# EAGLE board Master (EAGLE 7.7.0)
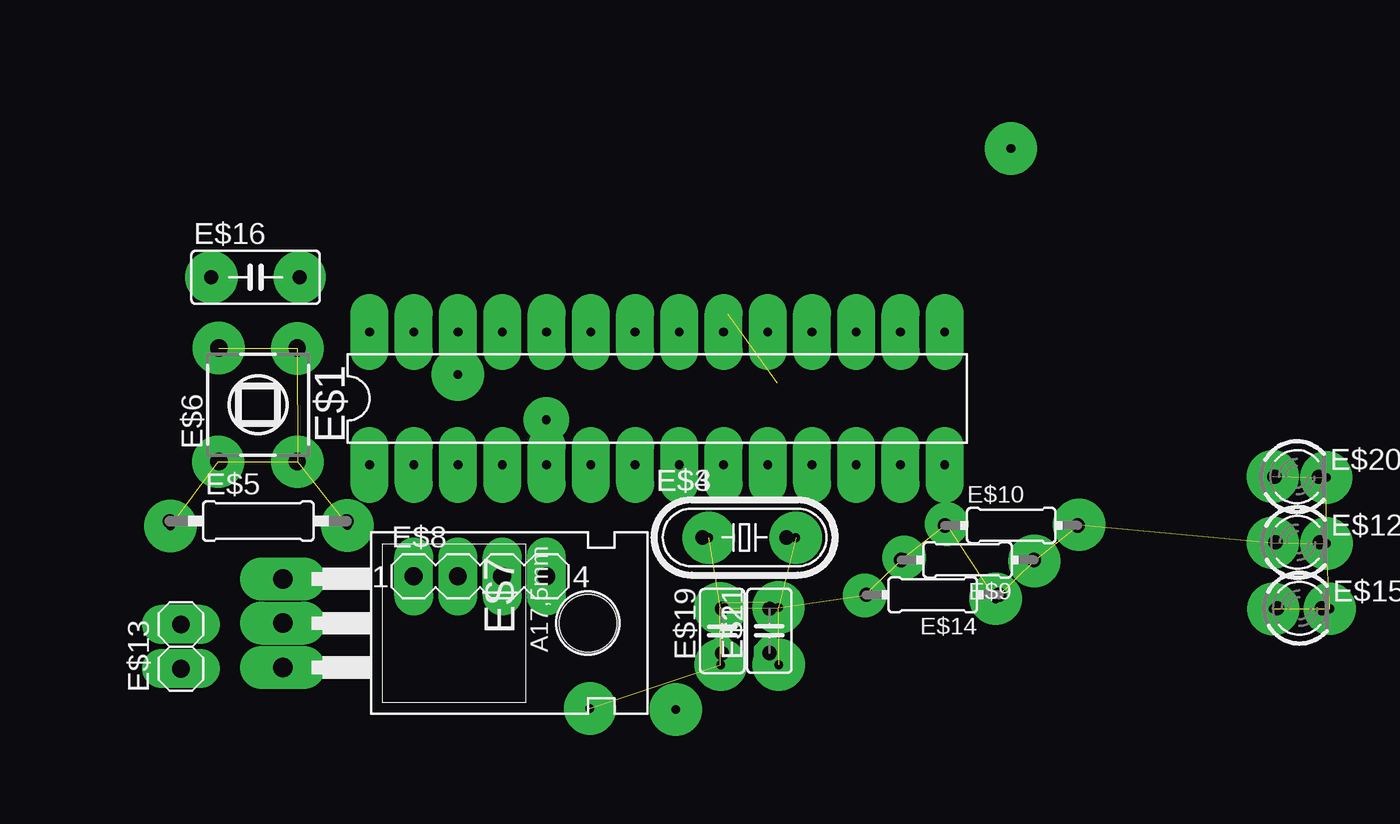
[diagram p0: board, top side]
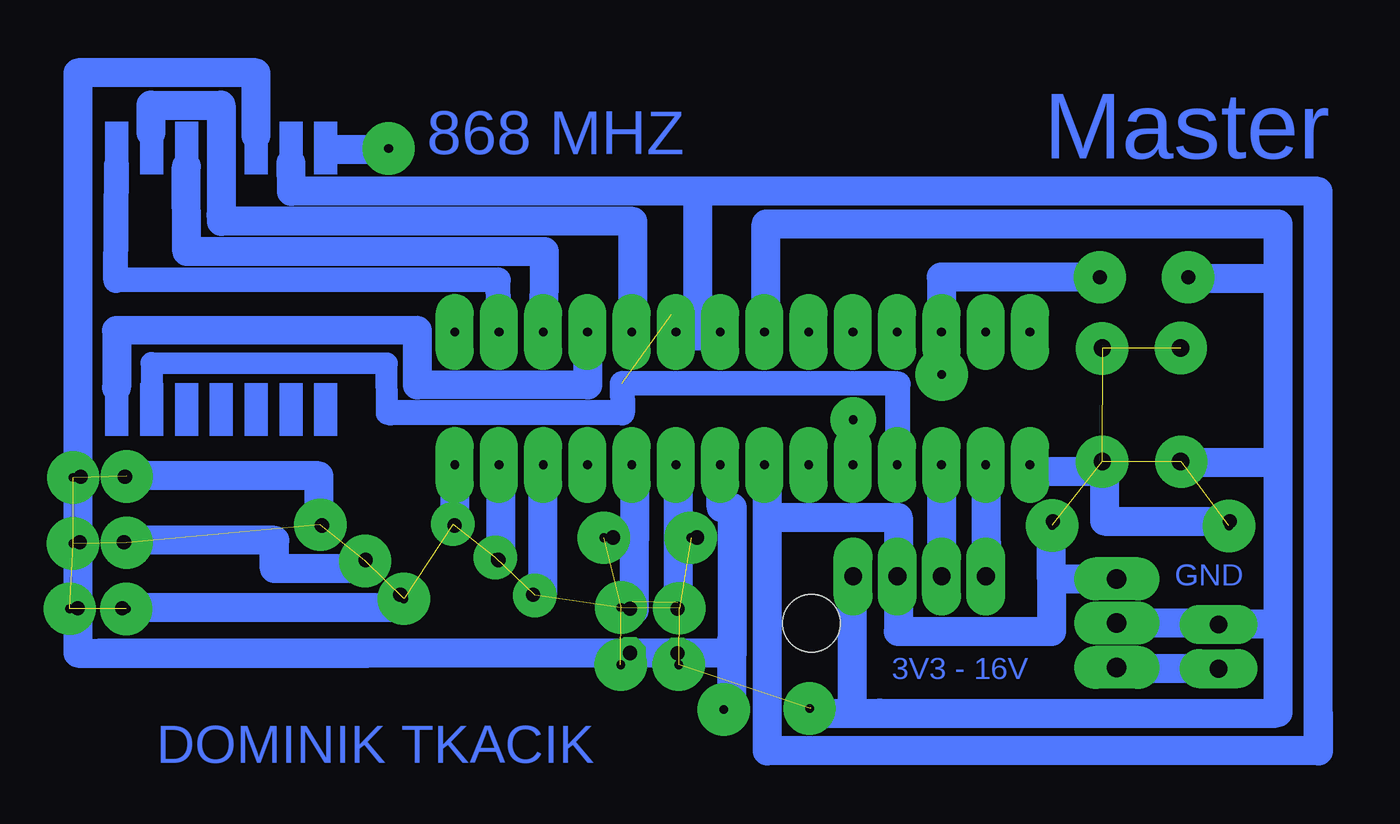
[diagram p1: board, bottom side, seen from below]

No outline drawn. Coordinates in mm, seen from the top.
Copper layers (1*16): Top 0.035mm / dielectric 1.5mm / Bottom 0.035mm
Design rules "default *": minimum track width 10mil, minimum drill 24mil, track to track 8mil, track to pad 8mil, pad to pad 8mil, via to via 8mil, smd to smd 8mil, copper to edge 40mil, drill to drill 8mil, minimum pad ring 10mil, minimum via ring 8mil, stop-mask expansion 4mil, vias tented up to drill 0mil, thermal gap 10mil

## Footprints (pad centres in the part's own frame; a part is rotated, then mirrored left to right if it is on the bottom)
DIL28-3 = drill 0.5 pad 2.184 long: 1 -16.51,-3.81; 2 -13.97,-3.81; 3 -11.43,-3.81; 4 -8.89,-3.81; 5 -6.35,-3.81; 6 -3.81,-3.81; 7 -1.27,-3.81; 8 1.27,-3.81; 9 3.81,-3.81; 10 6.35,-3.81; 11 8.89,-3.81; 12 11.43,-3.81; 13 13.97,-3.81; 14 16.51,-3.81; 15 16.51,3.81; 16 13.97,3.81; 17 11.43,3.81; 18 8.89,3.81; 19 6.35,3.81; 20 3.81,3.81; 21 1.27,3.81; 22 -1.27,3.81; 23 -3.81,3.81; 24 -6.35,3.81; 25 -8.89,3.81; 26 -11.43,3.81; 27 -13.97,3.81; 28 -16.51,3.81
C2.5-2 = drill 0.813 pad 1.6 octagon: 1 -1.27,0; 2 1.27,0
HC49/S = drill 0.813: 1 -2.413,0; 2 2.413,0
0207/10 = drill 0.813 octagon: 1 -5.08,0; 2 5.08,0
TL1105T = drill 1 pad 1.676: 1 -2.25,3.25; 2 2.25,3.25; 3 -2.25,-3.25; 4 2.25,-3.25
TO220 = drill 1.118 long: 1 -2.54,-6.35; 2 0,-6.35; 3 2.54,-6.35 | hole 3.302: 0,11.176
MA04-1 = drill 1.016 long: 1 -3.81,0; 2 -1.27,0; 3 1.27,0; 4 3.81,0
0204/7 = drill 0.813 octagon: 1 -3.81,0; 2 3.81,0
LED3MM = drill 0.813 octagon: A -1.27,0; K 1.27,0
1X02 = drill 1.016 long: 1 -1.27,0; 2 1.27,0
C050-030X075 = drill 0.813 octagon: 1 -2.54,0; 2 2.54,0

## Placement (x,y rotation side)
E$1  [DIL28-3]  59.75,65.13 0 top
E$2  [C2.5-2]  66.19,51.79 90 top
E$3  [HC49/S]  64.77,57.15 0 top
E$4  [HC49/S]  64.77,57.15 0 top
E$5  [0207/10]  36.85,58.09 0 top
E$6  [TL1105T]  36.83,64.77 0 top
E$7  [TO220]  44.6,52.23 270 top
E$8  [MA04-1]  49.58,54.92 0 top
E$9  [0204/7]  77.57,55.86 180 top
E$10  [0204/7]  80.08,57.84 0 top
E$11  [C2.5-2]  66.19,51.79 90 top
E$12  [LED3MM]  96.52,56.87 0 top
E$13  [1X02]  32.41,50.89 90 top
E$14  [0204/7]  75.57,53.86 180 top
E$15  [LED3MM]  96.63,53.09 0 top
E$16  [C050-030X075]  36.69,72.08 0 top
E$19  [C2.5-2]  63.48,51.78 90 top
E$20  [LED3MM]  96.47,60.64 0 top

## Library data of the parts
E$1 = atmega328L
E$2 E$11 E$19 = capacitor-wima
E$3 E$4 = crystal
E$5 = resistor
E$6 = switch
E$7 = transistor-pnp
E$8 = con-lstb
E$9 E$10 E$14 = eagle-ltspice
E$12 E$15 E$20 = led
E$13 = pinhead
E$16 = rcl

## Tracks (layer width: path | path; a pad name or v marks a point on that pad's centre or on a via)
S$1
  Bottom 1.676: 63.45,60.93 63.45,52.99 63.49,52.99
S$2
  Bottom 1.676: 65.94,60.93 65.94,56.96 65.96,56.96 | 67.69,56.96 65.96,56.96 | 65.96,56.96 65.96,52.99
S$3
  Bottom 1.676: 26.68,47.01 26.68,44.9 58.32,44.9 58.32,59.47
S$4
  Bottom 1.676: 45.71,56.8 45.75,56.8 45.75,61.53
S$5
  Bottom 1.676: 48.28,61.13 48.32,61.13 48.32,56.72
S$6
  Bottom 1.676: 38.72,54.75 42,54.75 | 42,54.75 42,58.08 | 58.33,61.14 58.33,58.3 50.8,58.3 50.8,51.74 42,51.74 42,54.75
S$7
  Bottom 1.676: 38.96,61.44 38.96,58.09 32.68,58.09
S$8
  Bottom 1.676: 53.46,55.01 53.46,47.06 29.22,47.06
S$9
  Bottom 1.676: 31.38,52.22 39.31,52.22
S$10
  Bottom 1.676: 32.38,49.61 39.02,49.61 37.02,49.67
S$12
  Bottom 1.676: 62.29,69.14 62.3,77.01 85.63,77.01 85.66,78.65
S$13  (via drill 0.5 pad 3)  (5 unrouted)
  other vias: 34.57,68.02 39.09,68 41.97,57.84 39.1,61.49 34.55,61.5 31.81,57.81 80.06,79.47 39.23,72.08 34.16,72.08
S$14
  Bottom 1.676: 55.89,47.36 55.6,47.07 51.87,47.07
S$15
  Bottom 1.422: 60.9,68.59 63.53,68.59
S$16
  Bottom 0.406: 60.97,68.86 60.84,68.86
S$17
  Bottom 1.27: 80.15,64.27 80.16,67.12 93.67,67.16 93.67,65.81
S$18
  Bottom 1.676: 68.63,68.73 68.63,65.9 78.4,65.91 78.4,69.03 95.68,69.02 95.68,65.77
S$19
  Bottom 1.422: 73.71,68.7 73.76,71.94 95.72,71.91 95.67,78.54
S$20
  Bottom 1.676: 60.83,47.26 arc-90 60.33,47.76 60.33,51.45
S$21
  Bottom 1.676: 71.14,68.79 71.11,73.56 91.64,73.56 91.67,78.44
S$22
  Bottom 1.422: 60.32,58.87 60.97,58.87
  Bottom 1.676: 60.32,50.5 60.32,58.87 | 60.97,58.87 60.97,60.95 | 60.32,50.5 96.76,50.5 60.32,50.5
S$23
  Bottom 1.676: 93.69,80.38 93.69,81.97 89.68,81.97 89.68,75.65
S$24
  Bottom 1.676: 66.02,68.72 66.03,75.29 89.65,75.29
S$25
  Bottom 1.676: 83.39,79.42 80.16,79.42
S$26
  Bottom 1.676: 32.42,52.21 29.12,52.21 29.12,52.31
S$27  (1 unrouted)
  Bottom 1.422: 50.85,61.32 50.81,61.32 50.81,65.97 66.65,65.99 66.64,64.3 79.97,64.3
S$28
  Bottom 1.676: 76.28,61.12 76.28,57.86
S$29
  Bottom 1.676: 73.63,61.12 73.63,55.96
S$30  (via drill 0.5 pad 2.5, 0.5 pad 3)  (19 unrouted)
  other vias: 62.71,57.13 67.71,57.13 66.71,53.13 63.37,53.09 63.4,49.85 66.73,49.84 98.17,60.59 98.18,56.8 98.37,53.06 95.12,53.05 95.1,56.84 95.09,60.65 83.98,57.88 81.41,55.8 79.18,53.63 71.66,53.82 73.94,56 76.37,57.92 55.89,47.34 60.81,47.27
S$31
  Bottom 1.676: 62.19,57.16 63.33,57.16 63.33,57.12
S$32
  Bottom 1.676: 87.67,80.23 87.67,83.82 97.9,83.82 97.9,50.51 81.22,50.51
S$33
  Bottom 1.676: 71.22,61.23 71.22,53.99 71.8,53.99
S$34  (via drill 0.5 pad 2.6)
  other vias: 53.39,63.91
S$35
  Bottom 1.676: 84.05,57.83 84.05,60.68 95.19,60.68
S$36
  Bottom 1.676: 81.5,55.36 86.63,55.36 86.6,56.98 95.56,56.98
S$37
  Bottom 1.676: 79.37,53.11 95.63,53.11
S$38
  Bottom 1.676: 29,47.11 29,75.15 58.39,75.15 58.39,68.55
S$39
  Bottom 1.676: 34.56,61.47 29.23,61.47
S$40  (via drill 0.5 pad 3)
  other vias: 48.31,66.5
S$41  (via drill 0.1 pad 0.5)
  other vias: 43.24,68.94 45.78,68.94 48.33,68.94 50.86,68.94 53.4,68.94 55.93,68.94 58.48,68.94 61.02,68.94 63.55,68.94 66.09,68.94 68.63,68.93 71.17,68.92 73.72,68.92 76.27,68.94 76.27,61.32 73.72,61.32 71.17,61.32 68.63,61.32 66.1,61.31 63.58,61.31 61.02,61.33 58.48,61.32 55.94,61.32 53.4,61.32 50.86,61.33 48.32,61.32 45.79,61.31 43.24,61.33
S$42
  Bottom 1.676: 34.23,72.03 29.33,72.03
S$43
  Bottom 1.676: 39.26,72.09 48.33,72.09 48.33,69.65
S$44
  Bottom 1.676: 26.69,45.59 26.69,77.02 62.25,77.03
S$45  (1 unrouted)
S$54
  Bottom 1.422: 43.18,60.96 39.37,60.96
  Bottom 1.676: 43.18,60.96 39.37,60.96
(copper drawn outside any net)
  shapes: Bottom area x13

## Text on the board
Bottom: Master | 868 MHZ | GND | 3V3 - 16V | DOMINIK TKACIK